# Altium PCB Copy of Controle_Motor.PcbDoc
Units mil, origin at the board's own origin, x right, y up, seen from the top; angles counter-clockwise.
Board outline 2365 x 4730 mil, 2 copper layers (Top Layer, Bottom Layer); 22 components, 20 nets, 87 pads, 0 vias.
Unrouted connection lines stored in the file: 38.
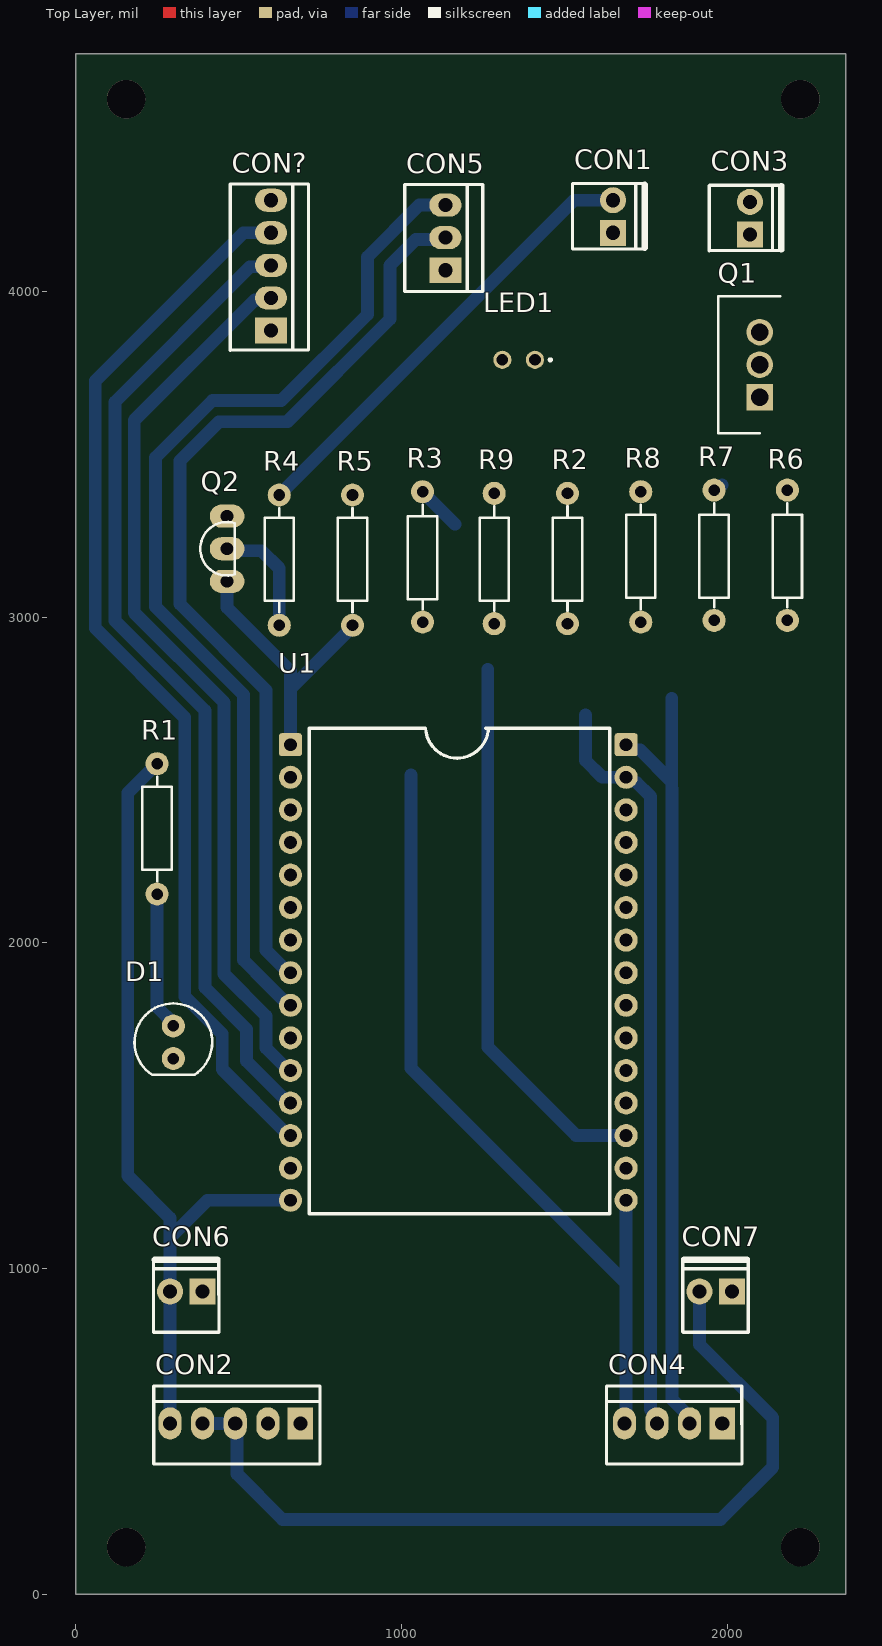
[diagram p0: Top Layer view]
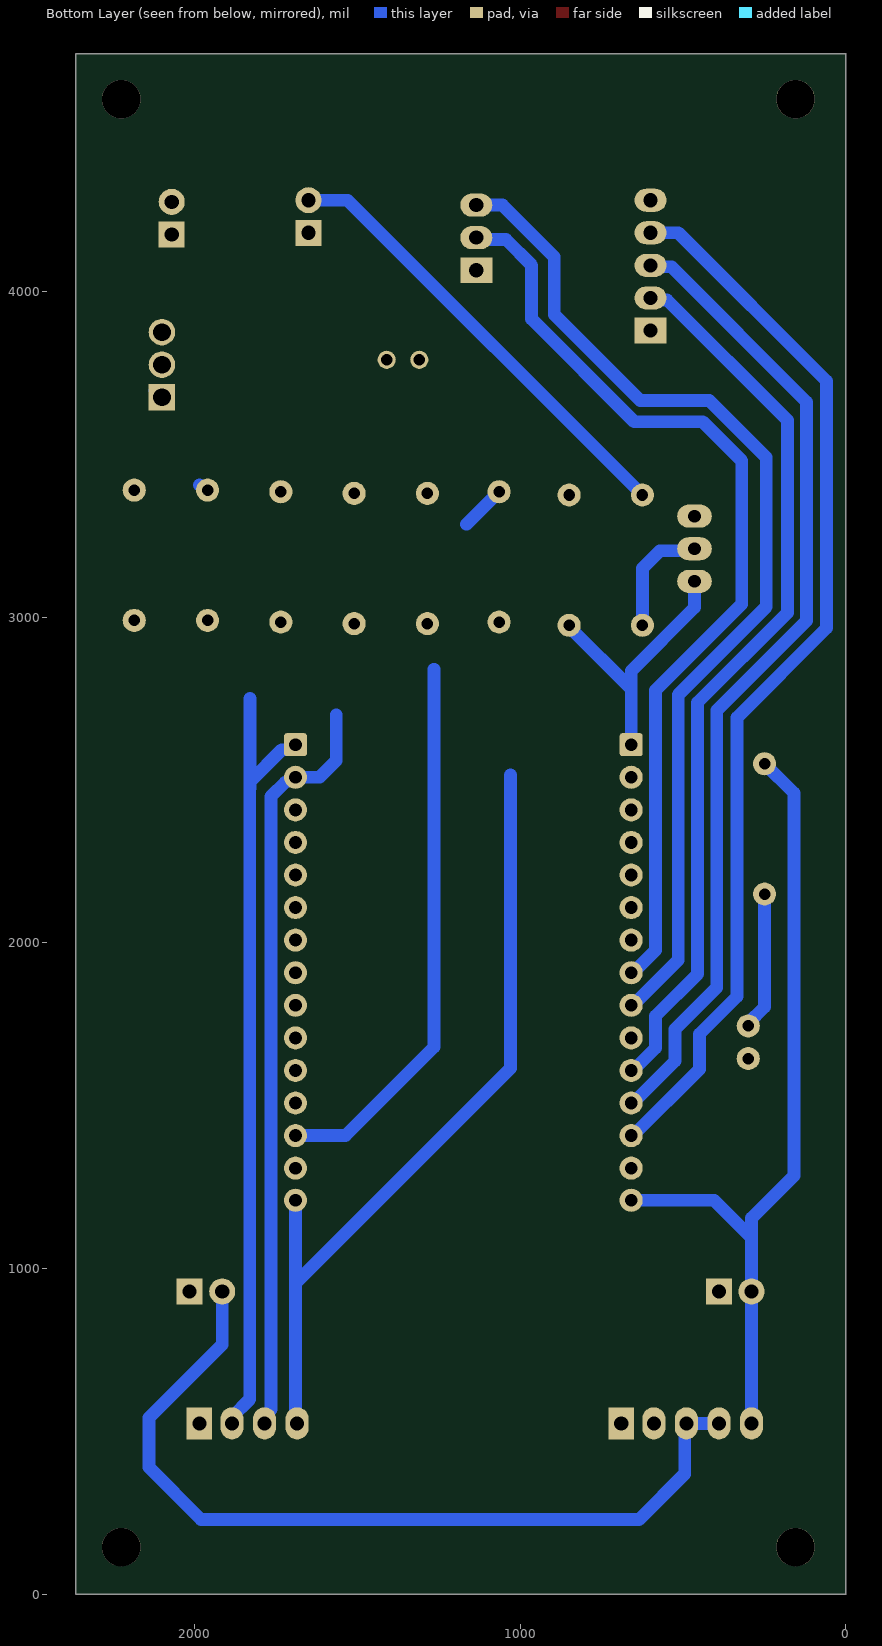
[diagram p1: Bottom Layer view, seen from below]

## Layer stack, top to bottom
Top Solder: solder mask 0.4, Solder Resist, Dk 3.5
Top Layer: signal copper 1.4
Dielectric 1: dielectric 12.6, FR-4, Dk 4.8
Bottom Layer: signal copper 1.4
Bottom Solder: solder mask 0.4, Solder Resist, Dk 3.5

## Board outline
0,0 2365,0 2365,4730 0,4730

## Design rules (kind name [scope] priority, off if disabled: settings)
Clearance [All] p1: gap=19.68 ignorepadtopadclearanceinfootprint=FALSE except(0: Arc-Text Arc-Hole Track-Text Track-Hole SMDPad-Text SMDPad-Hole THPad-Text THPad-Hole Via-Text Via-Hole Fill-Text Fill-Hole Poly-Text Poly-Hole Region-Text Region-Hole Text-Text Text-Hole)
ComponentClearance [All] p1: gap=11.81 collisioncheckmode=3 verticalgap=10 showdistances=FALSE
HoleSize [All] p1: absolutevalues=TRUE maxlimit=118.11 minlimit=29.53 maxpercent=80.000 minpercent=20.000
HoleToHoleClearance [All] p1: gap=3.94 allowstackedmicrovias=TRUE
MinimumSolderMaskSliver [All] p1: minsoldermaskwidth=1.97
PolygonConnect [All] p1: connectstyle=Relief reliefconductorwidth=10 reliefentries=4 polygonreliefangle="90 Angle" airgapwidth=10
RoutingVias [All] p1: holewidth=35.43 width=78.74 viastyle="Through Hole" minholewidth=35.43 minwidth=78.74 maxholewidth=35.43 maxwidth=78.74
SilkToSilkClearance [All] p1: silktosilkclearance=0
SilkToSolderMaskClearance [IsPad] p1: minsilkscreentomaskgap=0 clearancetoexposedcopper=TRUE
SolderMaskExpansion [All] p1: expansion=4 istentingtop=FALSE
Width [All] p1: maxlimit=157.48 minlimit=19.68 preferedwidth=39.37 minimp=50.000000 maximp=50.000000 favimp=50.000000
24 further rules are at their usual default settings.

## Components (designator, comment, footprint, x,y, rotation, side; value= is the part's Value field where it differs from the comment)
CON1 "KK_2.54_2vias" KK_2VIAS_180º 1650,4180 r90 top
CON2 "KK_2.54_5vias" KK_5vias_180° 690,525 r180 top
CON3 "KK_2.54_2vias" KK_2VIAS_180º 2070,4175 r90 top
CON4 "KK_2.54_4vias" KK_4vias_180° 1985,525 r180 top
CON5 "KK_2.54_3vias" KK_3vias_180º 1135,4065 r90 top
CON6 "KK_2.54_2vias" KK_2VIAS_180º 390,930 r180 top
CON7 "KK_2.54_2vias" KK_2VIAS_180º 2015,930 r180 top
CON? "KK_2.54_5vias" KK_5vias_180° 600,3880 r90 top
D1 "LED 5MM RED" "LED 5MM RED" 300,1695 r270 top
LED1 "1224HRC-5" 1224HRC5 1410,3790 r270 top
Q1 "IRFZ44NPBF" TO254P483X1016X1994-3P 2100,3675 r90 top
Q2 "BC549" TO92 465,3210 r90 top
R1 "RES 470R 1/4W CARBON FILM" "RES 470R 1/4W CARBON FILM" 250,2350 r90 top
R2 "RES 470R 1/4W CARBON FILM" "RES 470R 1/4W CARBON FILM" 1510,3180 r270 top
R3 "RES 470R 1/4W CARBON FILM" "RES 470R 1/4W CARBON FILM" 1065,3185 r270 top
R4 "RES 470R 1/4W CARBON FILM" "RES 470R 1/4W CARBON FILM" 625,3175 r90 top
R5 "RES 470R 1/4W CARBON FILM" "RES 470R 1/4W CARBON FILM" 850,3175 r90 top
R6 "4.7K" "RES 4.7K 1/4W CARBON FILM" 2185,3190 r270 top
R7 "4.7K" "RES 4.7K 1/4W CARBON FILM" 1960,3190 r270 top
R8 "RES 470R 1/4W CARBON FILM" "RES 470R 1/4W CARBON FILM" 1735,3185 r90 top
R9 "RES 470R 1/4W CARBON FILM" "RES 470R 1/4W CARBON FILM" 1285,3180 r270 top
U1 "microcontrolador" ESP32_Desvikit_v1 659.49,2608.43 r0 top value="ESP32 Desvikit V1"

## Footprints (in the part's own frame and the unit in brackets; to place one, negate y for a bottom-side part, rotate by r counter-clockwise, add the part's x,y. Pads: shape width x height; smd on the part's side, far side on the other; paste and mask are expansions set on the pad)
1224HRC5 [mm]
  round 1.416 hole 0.91: 1(0,0) 2(0,-2.54)
  silkscreen extent -0.1,1.1 0.1,1.3
ESP32_Desvikit_v1 [mm]
  rrect25% 1.8x1.8 hole 1: 1(0,0) 30(26.175,0)
  round 1.8 hole 1: 2(0,-2.54) 3(0,-5.08) 4(0,-7.62) 5(0,-10.16) 6(0,-12.7) 7(0,-15.24) 8(0,-17.78) 9(0,-20.32) 10(0,-22.86) 11(0,-25.4) 12(0,-27.94) 13(0,-30.48) 14(0,-33.02) 15(0,-35.52) 16(26.175,-35.52) 17(26.175,-33.02) 18(26.175,-30.48) 19(26.175,-27.94) 20(26.175,-25.4) 21(26.175,-22.86) 22(26.175,-20.32) 23(26.175,-17.78) 24(26.175,-15.24) 25(26.175,-12.7) 26(26.175,-10.16) 27(26.175,-7.62) 28(26.175,-5.08) 29(26.175,-2.54)
  silkscreen extent 1.47,-36.57 24.9,1.31, body extent -1.2,-46.07 27.48,4.86, height 16.2
KK_2VIAS_180º [mil]
  rect 80x80 hole 43.31: 1(0,0)
  round 80 hole 43.31: 2(100,0)
  silkscreen extent -50,-101 151,125, body extent -61,-108 165,128, height 464
KK_3vias_180º [mm]
  rect 2x2.5 hole 1.1: 1(0,0)
  oval 1.8x2.5 hole 1.1: 2(2.54,0) 3(5.08,0)
  silkscreen extent -1.65,-2.92 6.69,3.18, body extent -1.6,-2.95 6.69,3.05, height 11.9
KK_4vias_180° [mm]
  rect 2x2.5 hole 1.1: 1(0,0)
  oval 1.8x2.5 hole 1.1: 2(2.54,0) 3(5.08,0) 4(7.62,0)
  silkscreen extent -1.53,-2.92 9.02,3.18, body extent -1.4,-2.79 8.76,3.01, height 10.12
KK_5vias_180° [mm]
  rect 2x2.5 hole 1.1: 1(0,0)
  oval 1.8x2.5 hole 1.1: 2(2.54,0) 3(5.08,0) 4(7.62,0) 5(10.16,0)
  silkscreen extent -1.53,-2.92 11.43,3.18, body extent -1.4,-2.79 11.3,3.01, height 10.12
"LED 5MM RED" [mm]
  round 1.8 hole 0.9: 1(-1.27,0) 2(1.27,0)
  silkscreen extent -3.03,-3.03 2.54,3.03, body extent -2.98,-3.01 2.44,3.01, height 9.31
"RES 4.7K 1/4W CARBON FILM" [mm]
  round 1.8 hole 0.9: 1(-5.08,0) 2(5.08,0)
  silkscreen extent -4.06,-1.14 4.06,1.14, body extent -5.47,-1.27 5.47,1.27, height 3.27
"RES 470R 1/4W CARBON FILM" [mm]
  round 1.8 hole 0.9: 1(-5.08,0) 2(5.08,0)
  silkscreen extent -4.06,-1.14 4.06,1.14, body extent -5.47,-1.27 5.47,1.27, height 3.27
TO92 [mm]
  oval 1.8x2.7 hole 1: 1(-2.54,0) 2(0,0) 3(2.54,0)
  silkscreen extent -2.09,-0.6 2.09,2.08, body extent -2.74,-0.57 2.74,2.04, height 6.83
TO254P483X1016X1994-3P [mm]
  rect 2.07x2.07 hole 1.38: 1(0,0)
  round 2.07 hole 1.38: 2(2.54,0) 3(5.08,0)
  silkscreen extent -2.8,-1.61 7.88,3.22, body extent -2.54,-1.61 7.62,3.22, height 18.86

## Part data
CON1 CON3 CON6 CON7: "Conector KK 2.54mm 2 vias", Descrição="Conector KK 3 vias com passo 2.54mm", Encapsulamento="PTH - 180º", Modelo="2 vias - 180º", Valor="KK 2 vias 180º"
CON2 CON?: "Conector KK 2.54mm 5 vias", Descrição="Conector KK 3 vias com passo 2.54mm", Encapsulamento="PTH - 180º", Modelo="3 vias - 180º", Valor="KK 5 vias 180º"
CON4: "Conector KK 2.54mm 4 vias", Descrição="Conector KK 3 vias com passo 2.54mm", Encapsulamento="PTH - 180º", Modelo="3 vias - 180º", Valor="KK 4 vias 180º"
CON5: "Conector KK 2.54mm 3 vias", Descrição="Conector KK 3 vias com passo 2.54mm", Encapsulamento="PTH - 180º", Modelo="3 vias - 180º", Valor="KK 3 vias 180º"
D1: Current If Luminous Intensity=2, Forward Current If=20, Forward Voltage VF Max=2.5, LED Colour=Red, Manufacturer=Paralight, Manufacturer Part Number=IMP585, Operating Temperature Max=85, Operating Temperature Min=-40, Operating Temperature Range="-40°C to +85", Peak Forward Current=7, Supplier Part Number 1="Led 3mm Vermelho Difuso L-314HD - Paralight", Voltage Vf Typ="2.2V<!--FANDB--><div class=\"features-and-benefits-container\"><div class=\"features-and-benefits-description\"><span class=\"features-benefits-value\">The L-934LID from Kingbright is a through hole round shape high efficiency red colour LED. The device is made of gallium arsenide phosphide on gallium phosphide orange light emitting diode. This LED is widely used because of low power consumption, long life and solid state reliability.</span></div><div class=\"features-and-benefits-list\"><ul class=\"features-and-benefits-list-list\"><li class=\"features-and-benefits-list-item\">Standard bulb size of T-1 (3mm)</li><li class=\"features-and-benefits-list-item\">Reliable and rugged</li><li class=\"features-and-benefits-list-item\">Viewing angle is 60°</li><li class=\"features-and-benefits-list-item\">Luminous intensity of 3mcd at 2mA</li><li class=\"features-and-benefits-list-item\">Forward voltage is 2.0V</li><li class=\"features-and-benefits-list-item\">Forward current (If) is 20mA</li><li class=\"features-and-benefits-list-item\">Dominant wavelength is 625nm at IF=20mA</li><li class=\"features-and-benefits-list-item\">Peak wavelength is 627nm at IF=20", Bulb Size=3mm, ComponentLink1Description=http://loja.multcomercial.com.br/led-3mm-vermelho-difuso-l-314hd-paralight.html, ComponentLink1URL=http://loja.multcomercial.com.br/led-3mm-vermelho-difuso-l-314hd-paralight.html, Dominant Wavelength=625, External Diameter=2.9, External Length / Height=4.6, Forward Current If Max=20, Forward Voltage=2, Lead Cross-section Depth=0.5, Lead Cross-section Width=0.5, Lead Spacing=2.54, LED / Lamp Size="3mm / T-1", LED Mounting="Through Hole", LED Type=Standard, Lens Shape=Round, Luminous Intensity=3, Luminous Intensity @ If Min=0.7, Luminous Intensity Typ=3, Mounting Type="PCB Through Hole", MSL=-, No. of Pins=2, Packaging=Each, Peak Wavelength=625, PIV Max=5, Pricing 1="1=0.15 (BRL)", RoHS=YES, Stock 1=35260, Supplier 1="Mult Comercial", SVHC="No SVHC (15-Jun-2015)", Viewing Angle=60°, Wavelength Typ=625
LED1: "LED", Manufacturer_Name=Everlight, Datasheet Link=https://www.digchip.com/datasheets/parts/datasheet/158/1224HRC-5-pdf.php, Height=5.5mm, Manufacturer_Part_Number=1224HRC-5
Q1: "MOSFET (N-Channel)", Manufacturer_Name=Infineon, Mouser Part Number=942-IRFZ44NPBF, Arrow Part Number=IRFZ44NPBF, Arrow Price/Stock=https://www.arrow.com/en/products/irfz44npbf/infineon-technologies-ag, Datasheet Link=https://www.infineon.com/dgdl/irfz44npbf.pdf?fileId=5546d462533600a40153563b3a9f220d, Height=4.83mm, Manufacturer_Part_Number=IRFZ44NPBF, Mouser Price/Stock=https://www.mouser.co.uk/ProductDetail/Infineon-IR/IRFZ44NPBF?qs=9%252BKlkBgLFf24zghzPg2f9g%3D%3D
Q2: "TRANS NPN 30V 0.1A TO-92", Collector- Base Voltage VCBO="30 V", Collector-Emitter Saturation Voltage="200 mV", DC Current Gain hFE Max=800, Emitter- Base Voltage VEBO="5 V", Manufacturer="Fairchild Semiconductor", Maximum DC Collector Current="0.1 A", Maximum Operating Temperature="+ 150 C", Maximum Power Dissipation="0.5 W", Minimum Operating Temperature="- 65 C", Package / Case=TO-92-3, Supplier Part Number 1=512-BC549, Brand="Fairchild Semiconductor", Collector- Emitter Voltage VCEO Max="30 V", ComponentLink1Description=https://datasheet.ciiva.com/982/bc546-982130.pdf, ComponentLink1URL=https://datasheet.ciiva.com/982/bc546-982130.pdf, ComponentLink2Description=https://datasheet.ciiva.com/17179/bc549-17179663.pdf, ComponentLink2URL=https://datasheet.ciiva.com/17179/bc549-17179663.pdf, Configuration=Single, DC Collector/Base Gain hfe Min=110, Factory Pack Quantity=2000, Gain Bandwidth Product fT="300 MHz", Manufacturer Part Number=BC549, Mounting Style="Through Hole", Packaging=Bulk, Product Category="Bipolar Transistors - BJT", RoHS=Details, Series=BC549, Supplier 1=Mouser, Transistor Polarity=NPN
R1: "RES 470R OHM 1/4W 5% CARBON FILM", Manufacturer=Ty-Ohm, Manufacturer Part Number=CR25, Operating Temperature="-55°C ~ 155°C", Package / Case=Axial, Power (Watts)="0.25W, 1/4W", Resistance (Ohms)=470R, Supplier Part Number 1="Resistor de Filme de Carbono 1/4 de Watt CR25 5% de tolerância - 0.22R Ω à 10M Ω", Temperature Coefficient="0/ -500ppm/°C", Tolerance=±5%, Category=Resistors, ComponentLink1Description=http://loja.multcomercial.com.br/resistor-de-1-4-de-watt-cr25-5-de-tolerancia.html, ComponentLink1URL=http://loja.multcomercial.com.br/resistor-de-1-4-de-watt-cr25-5-de-tolerancia.html, Composition="Carbon Film", Features="Flame Retardant Coating, Safety", Height=-, Number of Terminations=2, Packaging="Cut Tape (CT)", Pricing 1="1=0.20 (BRL)", RoHS="RoHS Compliant", Size / Dimension="0.091\" Dia x 0.256\" L (2.30mm x 6.50mm)", Stock 1=617543, Supplier 1="Mult Comercial", Supplier Device Package=Axial
R2 R3 R4 R5 R8 R9: "RES 470R OHM 1/4W 5% CARBON FILM", Manufacturer=Ty-Ohm, Manufacturer Part Number=CR25, Operating Temperature="-55°C ~ 155°C", Package / Case=Axial, Power (Watts)="0.25W, 1/4W", Resistance (Ohms)=2200R, Supplier Part Number 1="Resistor de Filme de Carbono 1/4 de Watt CR25 5% de tolerância - 0.22R Ω à 10M Ω", Temperature Coefficient="0/ -500ppm/°C", Tolerance=±5%, Category=Resistors, ComponentLink1Description=http://loja.multcomercial.com.br/resistor-de-1-4-de-watt-cr25-5-de-tolerancia.html, ComponentLink1URL=http://loja.multcomercial.com.br/resistor-de-1-4-de-watt-cr25-5-de-tolerancia.html, Composition="Carbon Film", Features="Flame Retardant Coating, Safety", Height=-, Number of Terminations=2, Packaging="Cut Tape (CT)", Pricing 1="1=0.20 (BRL)", RoHS="RoHS Compliant", Size / Dimension="0.091\" Dia x 0.256\" L (2.30mm x 6.50mm)", Stock 1=617543, Supplier 1="Mult Comercial", Supplier Device Package=Axial
R6 R7: library part "RES 4.7K 1/4W CARBON FILM", "RES 4.7K OHM 1/4W 5% CARBON FILM", Manufacturer=Ty-Ohm, Manufacturer Part Number=CR25, Operating Temperature="-55°C ~ 155°C", Package / Case=Axial, Power (Watts)="0.25W, 1/4W", Resistance (Ohms)=?, Supplier Part Number 1="Resistor de Filme de Carbono 1/4 de Watt CR25 5% de tolerância - 0.22R Ω à 10M Ω", Temperature Coefficient="0/ -500ppm/°C", Tolerance=±5%, Category=Resistors, ComponentLink1Description=http://loja.multcomercial.com.br/resistor-de-1-4-de-watt-cr25-5-de-tolerancia.html, ComponentLink1URL=http://loja.multcomercial.com.br/resistor-de-1-4-de-watt-cr25-5-de-tolerancia.html, Composition="Carbon Film", Features="Flame Retardant Coating, Safety", Height=-, Number of Terminations=2, Packaging="Cut Tape (CT)", Pricing 1="1=0.20 (BRL)", RoHS="RoHS Compliant", Size / Dimension="0.091\" Dia x 0.256\" L (2.30mm x 6.50mm)", Stock 1=617543, Supplier 1="Mult Comercial", Supplier Device Package=Axial
U1: library part "ESP32 Desvikit v1", "microcontrolador com moculo bluethoth e wifi"

## Free pads (board coordinates)
  round 118.11 hole 118.11: 6(155,4590) 6(2225,4590) 7(2225,145) 8(155,145)

## Nets (pads, with @x,y where several pads share a name; then routed paths per layer and width w, separated by ;. In a path a pad name is that pad's centre, name@x,y a point inside that pad or via, vN(x,y) a via of type N, cw(c..) or ccw(c..) an arc to the next point about the centre after c; other vN are vias at no path point)
3V3p: CON4.4 CON?.5 R5.2 R6.1 R7.1 U1.16 | length 2517.7
  Bottom Layer w39.37: R5.2 R5.2@856.03,3381.03 ; 1030,2515 1030,1615 1690,955 ; CON4.4@1690,565 1690,955 ; U1.16 1690,955 ; R7.1 1968.52,3390 R7.1@1984.27,3405.75
+5: CON2.3 CON2.4 CON7.2 | length 2659.5
  Bottom Layer w39.37: CON2.4 CON2.3 495,520 495,370 635,230 1980,230 2140,390 2140,542 1915,767 CON7.2
+12: CON2.5 CON6.2 R1.2 U1.15 | length 2522.3
  Bottom Layer w39.37: R1.2 160,2460 160,1285 290,1155 290,1102.77 CON6.2 CON2.5 ; 297.77,1102.77 405,1210 U1.15
acelerador: CON5.3 U1.9 | length 3171
  Bottom Layer w39.37: U1.9 653.7,1808.43 584.69,1877.44 515,1947.13 515,2762.03 245,3032.03 245,3490 420,3665 631.48,3665 895.74,3929.26 895.74,4105.74 1055,4265 CON5.3
Chave: R2.2 R3.2 U1.18 | length 1697.5
  Bottom Layer w39.37: 1265,2840 1265,1680 1536.57,1408.43 U1.18
CLK: CON?.2 U1.11 | length 2773.5
  Bottom Layer w39.37: CON?.2 593.97,3973.97 549.71,3973.97 180,3604.26 180,3013.52 455.94,2737.57 455.94,1904.06 584.69,1775.31 584.69,1677.44 653.7,1608.43 U1.11
en: Q2.1 R5.1 U1.1 | length 870.2
  Bottom Layer w39.37: Q2.1@455,3100 Q2.1 465,3029.21 659.49,2834.72 659.49,2780 ; U1.1 659.49,2780 ; R5.1 850,2970.51 659.49,2780
GND: CON1.1 CON2.1 CON2.2 CON4.1 CON5.1 CON6.1 CON7.1 CON?.1 D1.2 LED1.1 Q2.3 R8.1 R9.1 U1.14 U1.17
MISO: CON?.3 U1.12 | length 3031.6
  Bottom Layer w39.37: CON?.3 595.67,4075.67 535.67,4075.67 120.94,3660.94 120.94,2989.06 396.89,2713.11 396.89,1863.11 525,1735 525,1637.13 653.7,1508.43 U1.12
MOSI: CON?.4 U1.13 | length 3296.7
  Bottom Layer w39.37: CON?.4 515,4180 60,3725 60,2966.48 335,2691.48 335,1835 450,1720 450,1612.13 653.7,1408.43 U1.13
NetCON1_2: CON1.2 R4.2 | length 1399.9
  Bottom Layer w39.37: R4.2 1530,4280 CON1.2
NetCON3_1: CON3.1 Q1.3 R9.2
NetCON3_2: CON3.2 Q1.2
NetD1_1: D1.1 R1.1 | length 425.7
  Bottom Layer w39.37: R1.1 250,1803.52 299.99,1753.52 D1.1
NetLED1_2: LED1.2 R3.1 | length 141.4
  Bottom Layer w39.37: R3.1 1165,3285
NetQ1_1: Q1.1 R2.1 R8.2 | length 29.8
  Bottom Layer w39.37: Q1.1 Q1.1@2121.06,3696.06
NetQ2_2: Q2.2 R4.1 | length 359.9
  Bottom Layer w39.37: Q2.2 471.03,3203.97 571.03,3203.97 625,3150 R4.1
SCL_IN: CON4.2 R6.2 U1.30 | length 2433.9
  Bottom Layer w39.37: U1.30 1705.75,2592.68 1732.29,2592.68 1830,2494.97 ; 1830,2474.21 1830,2494.97 ; 1830,2750 1830,2494.97 ; 1830.63,2473.58 1830.63,598.94 1885,544.57 CON4.2
SDA_IN: CON4.3 R7.2 U1.29 | length 2280
  Bottom Layer w39.37: 1565,2700 1565,2560 1616.57,2508.43 U1.29 ; 1722.28,2492.63 1765,2449.91 1765,567.3 1785,547.3 CON4.3
volante: CON5.2 U1.8 | length 2911
  Bottom Layer w39.37: U1.8 653.7,1908.43 584.68,1977.44 584.68,2775.86 320,3040.55 320,3480 440,3600 650,3600 965,3915 965,4080 1043.97,4158.97 1128.97,4158.97 CON5.2
pads on no net: U1.2 U1.3 U1.4 U1.5 U1.6 U1.7 U1.10 U1.19 U1.20 U1.21 U1.22 U1.23 U1.24 U1.25 U1.26 U1.27 U1.28

## Text inside footprints (layer, text, board x,y; h text height)
D1: Mechanical 29 "K" at 240,1670 h19.68 r270; Mechanical 29 "A" at 240,1740 h19.68 r270
Q2: Mechanical 29 "1" at 409.88,3084.02 h19.68 r90
R1: Mechanical 29 "1" at 290,2195 h19.68 r90
R2: Mechanical 29 "1" at 1470,3335 h19.68 r270
R3: Mechanical 29 "1" at 1025,3340 h19.68 r270
R4: Mechanical 29 "1" at 665,3020 h19.68 r90
R5: Mechanical 29 "1" at 890,3020 h19.68 r90
R6: Mechanical 29 "1" at 2145,3345 h19.68 r270
R7: Mechanical 29 "1" at 1920,3345 h19.68 r270
R8: Mechanical 29 "1" at 1775,3030 h19.68 r90
R9: Mechanical 29 "1" at 1245,3335 h19.68 r270